# Altium PCB top.PcbDoc
Units mm, origin at the board's own origin, x right, y up, seen from the top; angles counter-clockwise.
Board outline 80 x 54 mm, 2 copper layers (Top Layer, Bottom Layer); 80 components, 53 nets, 230 pads, 72 vias.
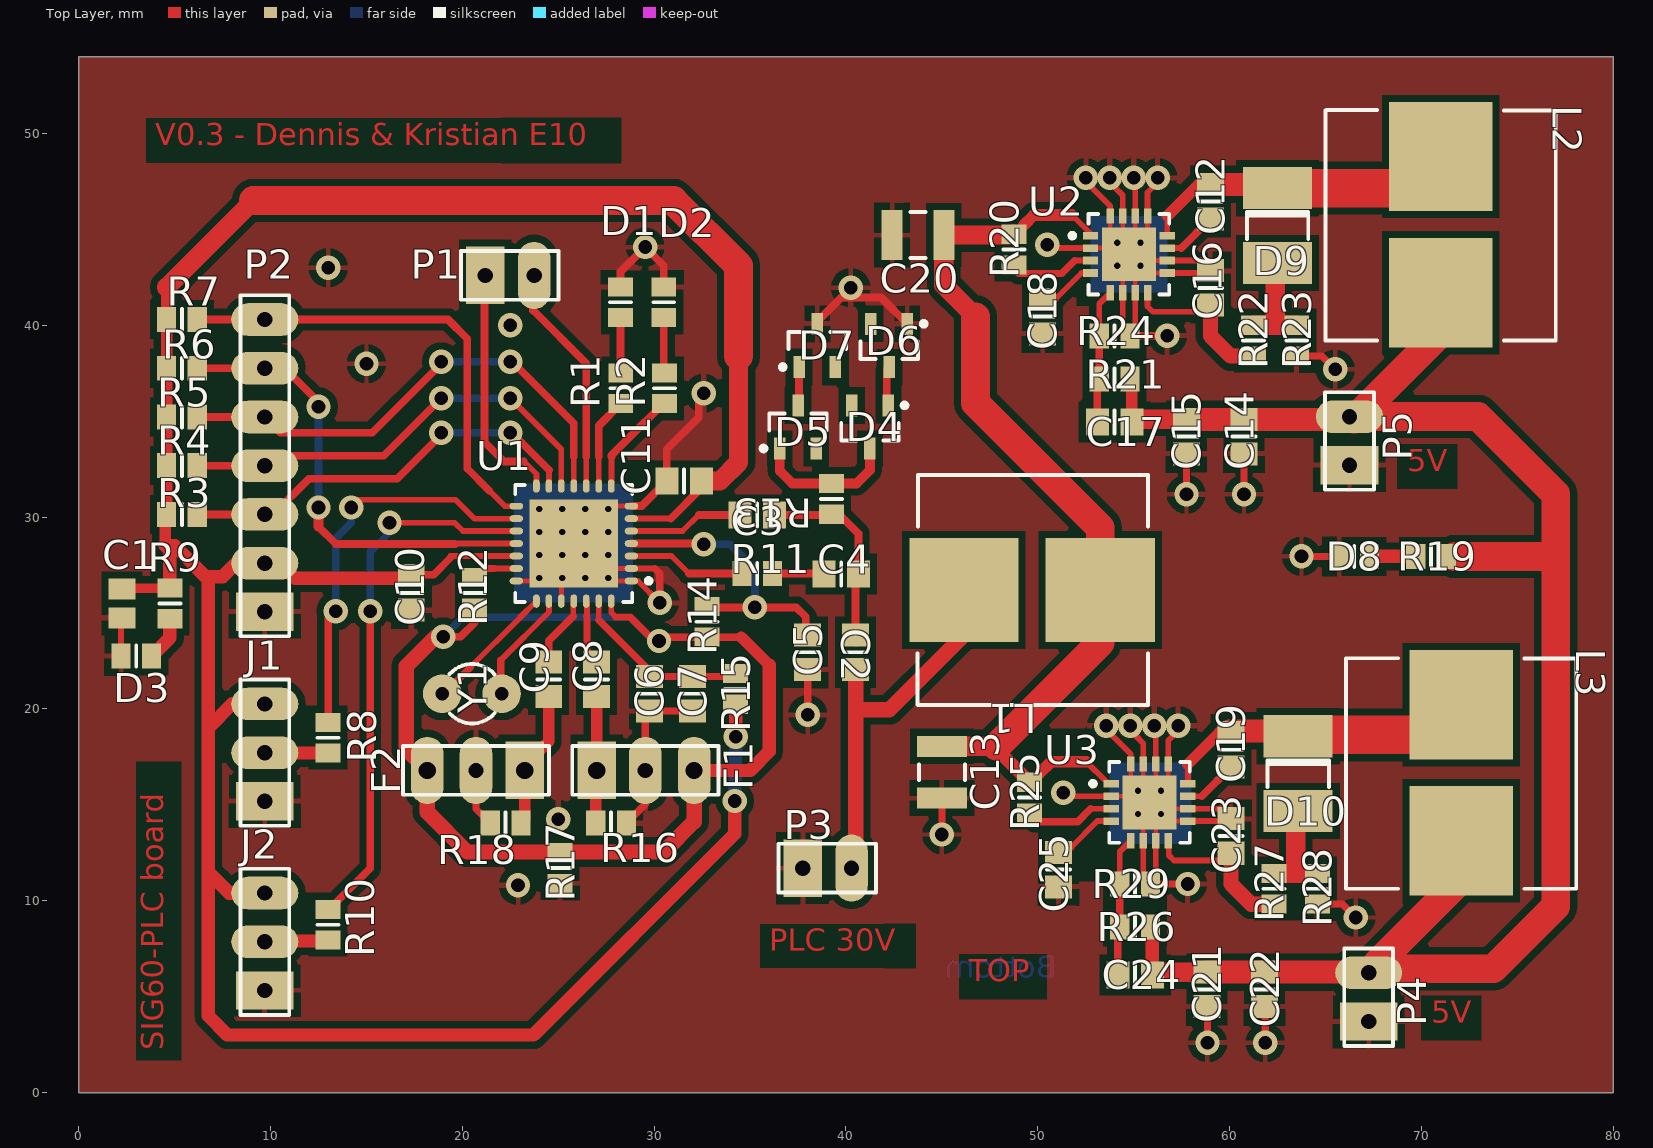
[diagram p0: Top Layer view]
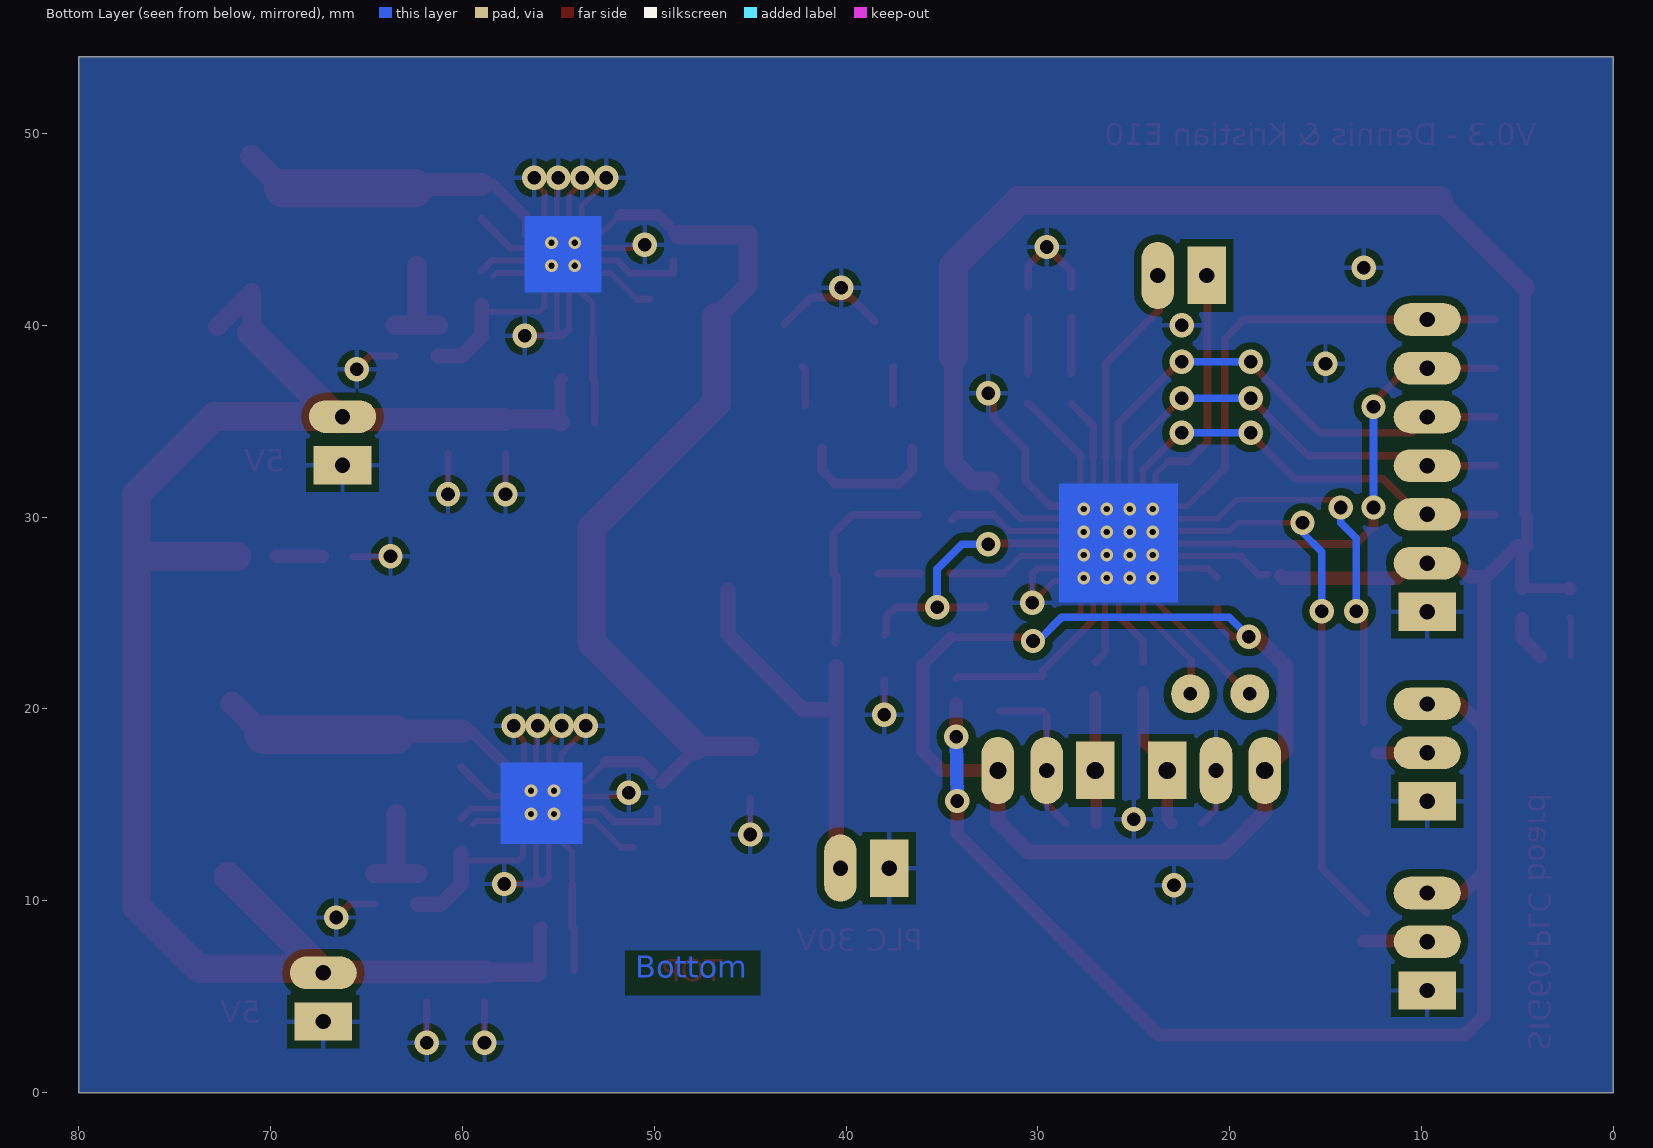
[diagram p1: Bottom Layer view, seen from below]

## Layer stack, top to bottom
Top Layer: signal copper 0.0356
Dielectric: core 0.32, FR-4, Dk 4.8
Bottom Layer: signal copper 0.0356

## Board outline
0,0 80,0 80,54 0,54

## Design rules (kind name [scope] priority, off if disabled: settings)
Clearance Clearance_text [(InNet('GND') AND IsRegion) vs IsText] p1: gap=0
Clearance [All] p2: gap=0.381
PlaneConnect [All] p1: planeconnectstyle=Relief reliefexpansion=0.508 reliefentries=4 reliefconductorwidth=0.2 reliefairgap=0.3
PolygonConnect [All] p1: connectstyle=Relief reliefconductorwidth=0.254 reliefentries=4 polygonreliefangle="90 Angle"
RoutingVias [All] p1: holewidth=0.6 width=1 viastyle="Through Hole" minholewidth=0.711 minwidth=1.27 maxholewidth=0.711 maxwidth=1.27
SilkToSilkClearance [All] p1: silktosilkclearance=0
SilkscreenOverComponentPads [All] p1: minsilkscreentomaskgap=0
SolderMaskExpansion [All] p1: expansion=0.102
Width Width_5V [InNet('+5V')] p1: maxlimit=3 minlimit=0.5 preferedwidth=0.889 bottomlayer_maxwidth=1.524 minimp=50.000000 maximp=50.000000 favimp=50.000000
Width Width_30V [InNet('30VDC_PL')] p2: maxlimit=3 minlimit=0.5 preferedwidth=1.016 bottomlayer_maxwidth=1.524 minimp=50.000000 maximp=50.000000 favimp=50.000000
Width Width_all [All] p3: maxlimit=2 minlimit=0.25 preferedwidth=0.508 bottomlayer_maxwidth=0.762 minimp=50.000000 maximp=50.000000 favimp=50.000000
Width Width_3v3 [InNet('+3V3')] p4: maxlimit=1.524 minlimit=0.3 preferedwidth=0.762 minimp=50.000000 maximp=50.000000 favimp=50.000000
25 further rules are at their usual default settings.

## Classes and differential pairs
component class "Power Supply": C10 C13 C14 C15 C16 C17 C18 C19 C20 C21 C22 C23 C24 C25 D9 D10 L2 L3 R18 R21 R23 R24 R25 R26 R28 U2 U3
component class top: C1 C2 C3 C4 C5 C6 C7 C8 C9 D1 D2 D3 D4 D5 D6 D7 D8 F1 F2 J1 J2 L1 P1 P2 P3 P4 P5 R1 R2 R3 R4 R5 R6 R7 R8 R9 R10 R11 R12 R13 R14 R15 R16 R18 R19 U1 Y1

## Components (designator, comment, footprint, x,y, rotation, side; value= is the part's Value field where it differs from the comment)
C1 "Cap Pol3" C0805 2.25,25.5 r270 top
C2 "Cap Semi" 6-0805_N 40.5,22.95 r270 top
C3 "Cap Semi" 6-0805_N 35.37,30.111 r180 top
C4 "Cap Semi" 6-0805_N 39.75,27.041 r180 top
C5 "Cap Semi" 6-0805_N 38,22.95 r90 top
C6 "Cap Semi" 6-0805_N 29.75,20.791 r90 top
C7 "Cap Semi" 6-0805_N 32,20.791 r90 top
C8 "Cap Semi" 6-0805_N 27,21.541 r90 top
C9 "Cap Semi" 6-0805_N 24.5,21.541 r90 top
C10 "Cap Semi" 6-0805_N 17.336,26.047 r90 top
C11 "Cap Semi" 6-0805_N 31.56,31.889 r0 top
C12 "Cap Semi" 6-0805_N 59,46.45 r270 top
C13 "Cap Semi" C1210 45,16.7 r90 top
C14 "Cap Semi" 6-0805_N 60.75,34.2 r90 top
C15 "Cap Semi" 6-0805_N 57.75,34.2 r90 top
C16 "Cap Semi" 6-0805_N 59,41.95 r270 top
C17 "Cap Semi" 6-0805_N 54,34.95 r0 top
C18 "Cap Semi" 6-0805_N 50.25,40.45 r90 top
C19 "Cap Semi" 6-0805_N 60.075,17.875 r270 top
C20 "Cap Semi" C1210 43.75,44.7 r0 top
C21 "Cap Semi" 6-0805_N 58.825,5.375 r90 top
C22 "Cap Semi" 6-0805_N 61.825,5.375 r90 top
C23 "Cap Semi" 6-0805_N 60.075,13.375 r270 top
C24 "Cap Semi" 6-0805_N 55.075,6.125 r0 top
C25 "Cap Semi" 6-0805_N 51.075,11.625 r90 top
D1 "TX_yellow" 6-0805_L 28.25,41.2 r90 top
D2 "RX_yellow" 6-0805_L 30.5,41.2 r90 top
D3 "PWR_Green" 6-0805_L 3,22.75 r180 top
D4 "BAS70" SOT-23_N 41.25,34.7 r270 top
D5 "BAS70" SOT-23_N 37.5,34.7 r90 top
D6 "BAS70" SOT-23_N 42.25,38.95 r270 top
D7 "BAS70" SOT-23_N 38.5,38.95 r90 top
D8 "PWR_Green" 6-0805_L 66.5,27.95 r180 top
D9 "SR34" CD4532-1812 62.5,45.2 r90 top
D10 "SR34" CD4532-1812 63.575,16.625 r90 top
F1 "5.5MHz" HDR1X3#1 27,16.791 r0 top
F2 "6.5MHz" HDR1X3#1 23.25,16.791 r180 top
J1 "Header 3" HDR1X3#2 9.7,15.18 r90 top
J2 "Header 3" HDR1X3#2 9.7,5.32 r90 top
L1 "100uH" WE_74477006 44.75,26.2 r0 top
L2 "6.3uH" WE_74477006 71,50.2 r270 top
L3 "6.3uH" WE_74477006 72.075,21.625 r270 top
P1 "Header 2" HDR1X2 21.2,42.6 r0 top
P2 "Header 7" HDR1X7 9.7,25.06 r90 top
P3 "Header 2" HDR1X2 37.75,11.7 r0 top
P4 "Header 2" HDR1X2 67.25,3.7 r90 top
P5 "Header 2" HDR1X2 66.25,32.7 r90 top
R1 "Res3" 6-0805_L 28.258,36.715 r270 top
R2 "Res3" 6-0805_L 30.544,36.715 r270 top
R3 "Res3" 6-0805_L 5.382,30.14 r0 top
R4 "Res3" 6-0805_L 5.382,32.68 r0 top
R5 "Res3" 6-0805_L 5.382,35.22 r0 top
R6 "Res3" 6-0805_L 5.382,37.76 r0 top
R7 "Res3" 6-0805_L 5.382,40.3 r0 top
R8 "Res3" 6-0805_L 13,18.5 r90 top
R9 "Res3" 6-0805_L 4.75,25.5 r90 top
R10 "Res3" 6-0805_L 13,8.75 r90 top
R11 "Res3" 6-0805_L 35.37,27.063 r0 top
R12 "Res3" 6-0805_L 20.638,26.047 r270 top
R13 "Res3" 6-0805_L 39.25,30.95 r90 top
R14 "Res3" 6-0805_L 32.75,24.541 r90 top
R15 "Res3" 6-0805_L 34.25,21.041 r90 top
R16 "Res3" 6-0805_L 27.75,14.041 r180 top
R17 "Res3" 6-0805_L 25.1,11.7 r270 top
R18 "Res3" 6-0805_L 22.25,14.041 r0 top
R19 "Res3" 6-0805_L 70.5,27.95 r0 top
R20 "Res3" 6-0805_L 48.75,43.95 r90 top
R21 "Res3" 6-0805_L 54,37.2 r0 top
R22 "Res3" 6-0805_L 61.25,39.2 r90 top
R23 "Res3" 6-0805_L 63.5,39.2 r90 top
R24 "Res3" 6-0805_L 54,39.45 r180 top
R25 "Res3" 6-0805_L 49.575,15.375 r90 top
R26 "Res3" 6-0805_L 55.075,8.625 r0 top
R27 "Res3" 6-0805_L 62.325,10.625 r90 top
R28 "Res3" 6-0805_L 64.575,10.625 r90 top
R29 "Res3" 6-0805_L 55.075,10.875 r180 top
U1 "SIG60" QFN65P600X600X90-28N 25.81,28.622 r180 top
U2 "Buck Converter" QFN65P400X400X80-16N 54.75,43.7 r0 top
U3 "Buck Converter" QFN65P400X400X80-16N 55.825,15.125 r0 top
Y1 "4MHz" R38 20.5,20.791 r90 top

## Footprints (in the part's own frame and the unit in brackets; to place one, negate y for a bottom-side part, rotate by r counter-clockwise, add the part's x,y. Pads: shape width x height; smd on the part's side, far side on the other; paste and mask are expansions set on the pad)
6-0805_L [mm] "Chip Resistor, Body 2.0x1.2mm, IPC High Density"
  rect 1x1.3 smd: 1(-0.8,0) 2(0.8,0)
  silkscreen extent 0,-0.55 0,0.55, body extent -1.07,-0.7 1.07,0.7, height 0.7
6-0805_N [mm] "Chip Resistor, Body 2.0x1.2mm, IPC Medium Density"
  rect 1.2x1.4 smd: 1(-0.9,0) 2(0.9,0)
  silkscreen extent 0,-0.6 0,0.6, body extent -1.07,-0.7 1.07,0.7, height 0.7
C0805 [mm] "Chip Capacitor, Body 2.0x1.3mm, IPC High Density"
  rect 1.1x1.4 smd: 1(-0.75,0) 2(0.75,0)
  body extent -1.1,-0.72 1.1,0.72, height 1.4
C1210 [mm] "Chip Capacitor, Body 3.2x2.5mm, IPC High Density"
  rect 1.1x2.6 smd: 1(-1.35,0) 2(1.35,0)
  silkscreen extent -0.4,-1.2 0.4,1.2, body extent -1.7,-1.35 1.7,1.35, height 1.3
CD4532-1812 [mm] "Chip Diode; Body 4.5 x 3.2 mm (LxW typ)"
  rect 2.2x3.6 smd: 1(-1.95,0) 2(1.95,0)
  silkscreen extent -0.7,-1.6 0.7,1.6
HDR1X2 [mm] "Connector; Header; 2 Position"
  rect 2x3 hole 0.8: 1(0,0)
  oval 1.7x3.5 hole 0.8: 2(2.54,0)
  silkscreen extent -1.27,-1.27 3.81,1.27
HDR1X3#1 [mm]
  rect 2x3 hole 0.9: 1(0,0)
  oval 1.7x3.5 hole 0.8: 2(2.54,0)
  oval 1.7x3.5 hole 0.9: 3(5.08,0)
  silkscreen extent -1.27,-1.27 6.35,1.27
HDR1X3#2 [mm] "Connector; Header; 3 Position"
  rect 2x3 hole 0.8: 1(0,0)
  oval 1.7x3.5 hole 0.8: 2(2.54,0) 3(5.08,0)
  silkscreen extent -1.27,-1.27 6.35,1.27
HDR1X7 [mm] "Connector; Header; 7 Position"
  rect 2x3 hole 0.8: 1(0,0)
  oval 1.7x3.5 hole 0.8: 2(2.54,0) 3(5.08,0) 4(7.62,0) 5(10.16,0) 6(12.7,0) 7(15.24,0)
  silkscreen extent -1.27,-1.27 16.51,1.27
QFN65P400X400X80-16N [mm] "QFN, 16-Leads, Body 4,2x4,2mm (max), Pitch 0,65mm, IPC Medium Density"
  rect 0.8x0.4 smd: 1(-2,0.975) 2(-2,0.325) 3(-2,-0.325) 4(-2,-0.975) 9(2,-0.975) 10(2,-0.325) 11(2,0.325) 12(2,0.975)
  rect 0.4x0.8 smd: 5(-0.975,-2) 6(-0.325,-2) 7(0.325,-2) 8(0.975,-2) 13(0.975,2) 14(0.325,2) 15(-0.325,2) 16(-0.975,2)
  rect 2.8x2.8 smd: 17(0,0)
  silkscreen extent -3.07,-2.1 2.1,2.1, body extent -2.08,-2.07 2.07,2.08, height 0.8
QFN65P600X600X90-28N [mm] "QFN, 28-Leads, Body 6,1x6,1mm (max), Pitch 0,65mm, IPC Medium Density"
  oval 0.7x0.35 smd: 1(-3,1.95) 2(-3,1.3) 3(-3,0.65) 4(-3,0) 5(-3,-0.65) 6(-3,-1.3) 7(-3,-1.95) 15(3,-1.95) 16(3,-1.3) 17(3,-0.65) 18(3,0) 19(3,0.65) 20(3,1.3) 21(3,1.95)
  oval 0.35x0.7 smd: 8(-1.95,-3) 9(-1.3,-3) 10(-0.65,-3) 11(0,-3) 12(0.65,-3) 13(1.3,-3) 14(1.95,-3) 22(1.95,3) 23(1.3,3) 24(0.65,3) 25(0,3) 26(-0.65,3) 27(-1.3,3) 28(-1.95,3)
  rect 4.6x4.6 smd: 29(0,0)
  silkscreen extent -4.03,-3.05 3.05,3.05, body extent -3.05,-3.05 3.05,3.05, height 0.9
R38 [mm] "Crystal, Thru-Hole; 2 Leads; Body 3.1 x 8.2 mm (Dia.xH)"
  round 2 hole 0.7: 1(0,1.55) 2(0,-1.55)
  silkscreen extent -1.55,-1.19 1.55,1.17
SOT-23_N [mm] "SOT23, 3-Leads, Body 2.9x1.3mm, Pitch 0.95mm, Lead Span 2.5mm, IPC Medium Density"
  rect 1.15x0.6 smd: 1(-1.125,0.95) 2(-1.125,-0.95) 3(1.125,0)
  silkscreen extent -1.25,-1.5 0.7,1.93, body extent -0.7,-1.5 0.7,1.5, height 1.1
WE_74477006 [mm]
  rect 5.7x5.4 smd: 1(1.4,0) 2(8.5,0)
  silkscreen extent -1.02,-6 11,6

## Part data
C1: "Polarized Capacitor (Surface Mount)"
C2 C3 C4 C5 C6 C7 C8 C9 C10 C11 C12 C13 C14 C15 C16 C17 C18 C19 C20 C21 C22 C23 C24 C25: "Capacitor (Semiconductor SIM Model)"
D1 D2 D3 D8: library part LED2, "Typical RED, GREEN, YELLOW, AMBER GaAs LED"
D4 D5 D6 D7: library part "Diode BAS70", "Silicon AF Schottky Diode for High-Speed Switching"
D9 D10: library part "D Schottky", "Schottky Diode"
F1 F2: library part "Ceramic Filters", "Header, 3-Pin"
J1 J2: "Header, 3-Pin"
L1 L2 L3: library part Inductor, "Header, 3-Pin"
P1 P3 P4 P5: "Header, 2-Pin"
P2: "Header, 7-Pin"
R1 R2 R3 R4 R5 R6 R7 R8 R9 R10 R11 R12 R13 R14 R15 R16 R17 R18 R19 R20 R21 R22 R23 R24 R25 R26 R27 R28 R29: "Resistor"
U1: "SIG60 device. UART to PLC device."
U2 U3: library part "A4403 Buck Converter", "Header, 3-Pin"
Y1: library part XTAL, "Crystal Oscillator"

## Via types
v1: diameter 1.27, hole 0.711, Top Layer to Bottom Layer, 48 vias
v2: diameter 0.66, hole 0.33, Top Layer to Bottom Layer, tented top, 24 vias

## Nets (pads, with @x,y where several pads share a name; then routed paths per layer and width w, separated by ;. In a path a pad name is that pad's centre, name@x,y a point inside that pad or via, vN(x,y) a via of type N, cw(c..) or ccw(c..) an arc to the next point about the centre after c; other vN are vias at no path point)
30VDC_PL: C2.2 L1.1 P3.2 | length 20.1
  Top Layer w0.8: P3.2@40.5,11.7 40.5,19.95 ; C2.2@40.5,22.2 C2.2 40.5,19.95 ; L1.1 46.15,23.85 42.25,19.95 40.5,19.95
+3V3: C1.1 C10.2 C11.2 J1.3 J2.3 P2.2 R3.1 R4.1 R5.1 R6.1 R7.1 R9.2 R15.1 U1.6 U1.19 | length 156.8
  Top Layer w0.3: 19.368,27.972 U1.19 ; U1.6 30.863,29.922
  Top Layer w0.381: C10.2@18,27 18.5,27 19.42,27.92
  Top Layer w0.4: 30.863,29.922 32.46,31.519 C11.2
  Top Layer w0.406: R3.1@4.5,30.058 R3.1
  Top Layer w0.5: C1.1@2.3,26.3 R9.2 ; C10.2 C10.2@17.389,27
  Top Layer w0.6: 4.5,28.5 R3.1@4.5,30.058 ; R3.1 R4.1 R5.1 R6.1 R7.1 4.582,41.982
  Top Layer w0.7: C1.1 C1.1@2.3,26.3 ; R9.2 4.75,28.25 4.5,28.5 5,28.5 6.75,26.75 ; 6.825,19.075 8.01,20.26 J1.3 ; 7.5,26.9 6.75,26.9 6.75,11.5 ; 7.6,27 8.2,27.6 P2.2 10.5,27.6 11.291,26.809 17.198,26.809 C10.2 ; J2.3 7.85,10.4 6.75,11.5 ; v1(34.2,15.2) 34.2,13.491 23.709,3 7.75,3 6.75,4 6.75,11.5 ; v1(34.25,18.541) R15.1
  Top Layer w1: 4.582,41.982 9.1,46.5 ; C11.2 33.439,31.889 34.4,32.85 34.4,38.4
  Top Layer w1.5: 9.1,46.5 31,46.5 34.4,43.1 34.4,38.4
  Bottom Layer w0.7: v1(34.2,15.2) v1(34.25,18.541)
+5V: C14.2 C15.2 C17.2 C21.2 C22.2 C24.2 L2.2 L3.2 P4.2 P5.2 R19.2 R21.2 R26.2 | length 94.7
  Top Layer w0.6: R21.2 54.9,37.1 C17.2 ; R26.2 R26.2@55.975,8.525
  Top Layer w0.7: C24.2@55.975,6.375 R26.2@55.975,8.525
  Top Layer w1: C17.2 55.05,35.1 C15.2 ; C24.2@56.125,6.275 C21.2 ; L2.2@71,39.6 L2.2 L2.2@72.75,39.95
  Top Layer w1.2: C15.2 C14.2 P5.2@66.5,35.1 ; C21.2 C22.2 P4.2@67.575,6.275
  Top Layer w1.5: P5.2 P5.2@66.64,35.24 ; P5.2@66.5,35.1 P5.2@66.64,35.24 ; P4.2@67.575,6.275 67.75,6.45 73.75,6.45 77,9.7 77,31.2 72.96,35.24 P5.2@66.64,35.24 ; P4.2@67.725,6.775 L3.2@72.225,11.275 ; L2.2@71,39.6 P5.2@66.64,35.24 ; R19.2@71.75,27.95 76.7,27.95
GND: C1.2 C5.1 C6.1 C7.1 C10.1 C11.1 C13.1 C14.1 C15.1 C16.1 C18.1 C20.1 C21.1 C22.1 C23.1 C25.1 D1.2 D2.2 D3.2 D6.1 D7.3 D8.2 F1.2 F2.2 J1.1 J2.1 P2.1 P3.1 P4.1 P5.1 R16.1 R17.2 R18.1 R23.1 R24.1 R28.1 R29.1 U1.1 U1.2 U1.7 U1.21 U1.24 U1.29 U2.2 U2.6 U2.7 U2.9 U2.10 U2.13 U2.14 U2.15 U2.16 U2.17 U3.2 U3.6 U3.7 U3.9 U3.10 U3.13 U3.14 U3.15 U3.16 U3.17 | length 145.6
  Top Layer w0.25: U1.21 U1.29@23.86,26.672 ; U1.24 U1.29@25.16,27.972 ; U1.29@27.11,27.322 U1.2 ; U1.29@27.76,26.672 U1.1 ; U1.29@27.76,30.572 U1.7 ; U2.2 54.425,44.025 U2.15 ; U2.17@53.775,44.675 U2.16 ; U3.2 55.5,15.45 U3.15 ; U2.6 U2.17@54.425,43.375 ; U3.17@54.85,16.1 U3.16 ; U2.7 55.075,43.375 U2.10 ; U2.17@55.075,44.025 U2.14 ; U3.6 U3.17@55.5,14.8 ; U2.17@55.725,42.725 U2.9 ; U2.17@55.725,44.675 U2.13 ; U3.7 56.15,14.8 U3.10 ; U3.17@56.15,15.45 U3.14 ; U3.17@56.8,14.15 U3.9 ; U3.17@56.8,16.1 U3.13
  Top Layer w0.3: D3.2 2.2,24.7 C1.2 ; U1.1 29.157,26.672 v1(30.29,25.539) ; U1.2 30.031,27.322 ; v1@50.825,44.025 U2.2 ; v1@51.65,15.45 U3.2@53.575,15.45 ; v1@52.5,47.45 52.55,47.45 53.775,46.225 U2.16 ; v1@53.575,18.875 53.625,18.875 54.85,17.65 U3.16 ; v1@54,47.45 54,47.2 54.425,46.775 U2.15 ; R24.1@54.425,39.825 U2.6 ; v1@55.075,18.875 55.075,18.625 55.5,18.2 U3.15 ; R24.1@55.075,39.725 U2.7 ; U2.14 v1@55.075,47.45 ; R29.1@55.5,11.25 U3.6 ; U2.13 55.725,46.925 v1@56.25,47.45 ; R29.1@56.15,11.15 U3.7 ; U3.14 v1@56.15,18.875 ; U2.9 58.225,42.725 C16.1@58.375,42.575 ; U2.10 C16.1@58.475,43.375 ; U3.13 56.8,18.35 v1@57.325,18.875 ; U3.9 59.3,14.15 C23.1@59.45,14 ; U3.10 C23.1@59.55,14.8
  Top Layer w0.381: F2.2 20.71,14.781 R18.1 ; R16.1 29.54,15.031 F1.2 29.54,19.681 C6.1 C7.1 ; 30.031,27.322 30.29,27.063 v1(30.29,25.539) ; v1(38,19.7) C5.1@38,21.541 ; v1(45,13.45) C13.1 ; U2.17@53.775,44.675 v2(54.15,44.3) 54.425,44.025 U2.17 ; R24.1@54.425,39.825 R24.1 ; U2.17@54.425,43.375 U2.17 ; U3.17@54.85,16.1 v2(55.225,15.725) 55.5,15.45 U3.17 ; R24.1@55.075,39.725 R24.1 ; R29.1@55.5,11.25 R29.1 ; U3.17@55.5,14.8 U3.17 ; U2.17@55.725,42.725 v2(55.35,43.1) 55.075,43.375 U2.17 ; U2.17@55.725,44.675 55.075,44.025 U2.17 ; R29.1@56.15,11.15 R29.1 ; v1@56.5,39.45 R24.1 ; U3.17@56.8,14.15 v2(56.425,14.525) 56.15,14.8 U3.17 ; U3.17@56.8,16.1 56.15,15.45 U3.17 ; v1@57.575,10.875 R29.1 ; v1(57.75,31.2) C15.1 ; C16.1@58.475,43.375 C16.1 ; v1(58.85,2.6) C21.1@58.85,4.7 ; C23.1@59.55,14.8 C23.1 ; v1(60.75,31.2) C14.1 ; v1(61.85,2.6) C22.1@61.85,4.7 ; R23.1 64.8,38.4 v1(65.5,37.7) ; v1@64,27.95 D8.2 ; R28.1 65.875,9.825 v1(66.575,9.125)
  Top Layer w0.406: U1.29@25.16,27.972 U1.29 ; v2(27.61,26.822) 27.11,27.322 v2(26.41,28.022) U1.29 ; U1.29@27.76,30.572 U1.29 ; D1.2 28.25,42.803 v1(29.528,44.081) 30.5,43.109 D2.2 ; U1.7@28.81,30.582 29.353,30.582 C11.1 30.66,33.529 32.322,35.191 v1@32.322,36.461 ; D7.3@38.5,40.2 39.75,41.45 41.825,41.45 D6.1
  other v1: 22.9,10.8 57.825,10.875 25,14.25 51.325,15.625 53.575,19.125 54.825,19.125 56.075,19.125 57.325,19.125 63.75,27.95 32.576,36.461 15,38 56.75,39.45 22.5,40 40.25,41.95 13,43 50.5,44.2 52.5,47.7 53.75,47.7 55,47.7 56.25,47.7
  other v2: 55.225,14.525 56.425,15.725 24.01,26.822 25.21,26.822 26.41,26.822 24.01,28.022 25.21,28.022 27.61,28.022 24.01,29.222 25.21,29.222 26.41,29.222 27.61,29.222 24.01,30.422 25.21,30.422 26.41,30.422 27.61,30.422 54.15,43.1 55.35,44.3
NetC2_1: C2.1 C3.1 C4.1 R13.1 | length 10.6
  Top Layer w0.406: C3.1 39.68,30.111 40.65,29.141 C4.1 40.5,26.891 40.5,23.895 40.546,23.85 C2.1@40.546,23.45
NetC3_2: C3.2 U1.5 | length 6.1
  Top Layer w0.3: U1.5 31.483,29.272 32.322,30.111
  Top Layer w0.406: 32.322,30.111 34.216,30.111 C3.2@34.47,29.857
NetC4_2: C4.2 R11.2 | length 2.1
  Top Layer w0.406: R11.2 C4.2@38.302,27.063
NetC5_2: C5.2 R14.2 U1.4 | length 14.8
  Top Layer w0.406: U1.4 v1@32.033,28.622 ; R14.2 32.8,25.291 v1(35.25,25.291) 37.409,25.291 37.9,24.8 37.9,23.95 C5.2
  Bottom Layer w0.406: v1(32.576,28.587) 33.954,28.587 35.25,27.291 v1(35.25,25.291)
NetC6_2: C6.2 C7.2 R15.2 U1.27 | length 9.6
  Top Layer w0.3: 27.11,24.64 U1.27
  Top Layer w0.381: 27.11,24.64 29.75,22 C6.2 C7.2 34.15,21.691 R15.2@34.25,21.591
NetC8_1: C8.1 F1.1 R16.2 | length 6.6
  Top Layer w0.6: R16.2 26.95,16.741 F1.1 C8.1
NetC8_2: C8.2 U1.26 | length 3.4
  Top Layer w0.3: 26.491,24.827 U1.26@26.491,25.591
  Top Layer w0.381: 26.491,24.827 26.5,24.818 26.5,22.941 C8.2
NetC9_1: C9.1 F2.1 R18.2 | length 6.3
  Top Layer w0.606: R18.2 23.25,14.241 F2.1 ; F2.1@23.902,17.703 24.5,18.301 C9.1@24.5,20.881
NetC9_2: C9.2 U1.25 | length 3.7
  Top Layer w0.3: 25.779,24.827 U1.25@25.779,25.591
  Top Layer w0.381: C9.2 24.5,23.548 25.779,24.827
NetC12_1: C12.1 D9.2 L2.1 U2.12 | length 16.7
  Top Layer w0.3: U2.12@56.75,44.679 56.75,45.7
  Top Layer w0.4: C12.1@58.4,47.35 C12.1 ; D9.2@62.3,47.35 D9.2
  Top Layer w0.6: 56.75,45.7 C12.1@58.4,47.35
  Top Layer w1.2: C12.1 D9.2@62.3,47.35 ; L2.1@69.35,47.15 L2.1
  Top Layer w2: D9.2 L2.1@69.35,47.15
NetC12_2: C12.2 U2.11 | length 2.9
  Top Layer w0.3: U2.11 57.475,44.025
  Top Layer w0.406: 57.475,44.025 C12.2
NetC13_2: C13.2 C20.2 L1.2 R20.2 R25.2 U2.1 U3.1 | length 49.7
  Top Layer w0.3: 51.779,45.75 U2.1@52.75,44.779 ; 52.529,17.25 U3.1@53.575,16.204
  Top Layer w0.6: R20.2@49.264,45.214 49.8,45.75 51.779,45.75 ; R25.2@50.089,16.639 50.7,17.25 52.529,17.25
  Top Layer w0.7: 47.85,17.9 R25.2
  Top Layer w1: C13.2 47.85,18.05 47.85,17.9 ; 46.75,40.45 45.1,42.1 C20.2 48.7,44.7 R20.2
  Top Layer w1.5: 46.75,40.45 46.75,35.95 53.25,29.45 L1.2 53.25,23.45 47.85,18.05
NetC16_2: C16.2 R22.1 U2.8 | length 8.5
  Top Layer w0.3: U2.8 55.725,40.975 56,40.7 58.65,40.7 C16.2
  Top Layer w0.8: C16.2 59,39.45 60.05,38.4 R22.1
NetC17_1: C17.1 R21.1 R24.2 U2.5 | length 7
  Top Layer w0.3: R24.2 53.2,41.125 U2.5
  Top Layer w0.381: C17.1 53.1,37.1 R21.1 R24.2
NetC18_2: C18.2 U2.4 | length 3.1
  Top Layer w0.3: C18.2@50.9,41.35 52.275,42.725 U2.4
  Top Layer w0.381: C18.2 C18.2@50.9,41.35
NetC19_1: C19.1 D10.2 L3.1 U3.12 | length 16.7
  Top Layer w0.3: U3.12@57.825,16.104 57.825,17.125
  Top Layer w0.4: C19.1@59.4,18.85 C19.1@60,18.85 ; D10.2@63.3,18.85 D10.2@63.5,18.65
  Top Layer w0.6: 57.825,17.125 C19.1@59.475,18.775
  Top Layer w1.2: C19.1@60,18.85 D10.2@63.3,18.85 ; L3.1@70.35,18.65 L3.1@72,20.3
  Top Layer w2: D10.2@63.5,18.65 L3.1@70.35,18.65
NetC19_2: C19.2 U3.11 | length 2.9
  Top Layer w0.3: U3.11 58.55,15.45
  Top Layer w0.406: 58.55,15.45 C19.2
NetC23_2: C23.2 R27.1 U3.8 | length 8.5
  Top Layer w0.3: U3.8@56.825,13.1 56.825,12.375 57.1,12.1 C23.2@59.75,12.1 ; C23.2@59.725,12.125 C23.2
  Top Layer w0.8: C23.2 60.075,10.875 61.125,9.825 R27.1
NetC24_1: C24.1 R26.1 R29.2 U3.5 | length 7
  Top Layer w0.3: R29.2 54.275,12.55 U3.5
  Top Layer w0.381: C24.1@54.175,6.375 54.175,8.525 R26.1 R29.2
NetC25_2: C25.2 U3.4 | length 3.1
  Top Layer w0.3: C25.2@51.725,12.775 53.1,14.15 U3.4@53.575,14.15
  Top Layer w0.381: C25.2@51.075,12.775 C25.2@51.725,12.775
NetD1_1: D1.1 R1.1 | length 2.9
  Top Layer w0.406: D1.1 28.25,37.523 R1.1
NetD2_1: D2.1 R2.1 | length 2.9
  Top Layer w0.406: D2.1 30.5,37.559 R2.1
NetD3_1: D3.1 R9.1 | length 2.3
  Top Layer w0.7: D3.1 4.75,23.7 R9.1
NetD4_1: D4.1 D6.3 | length 2
  Top Layer w0.406: D4.1@42.129,35.834 42.129,37.704 D6.3
NetD4_3: D4.3 D5.1 R13.2 | length 7.6
  Top Layer w0.5: D5.1 36.55,32.4 37.2,31.75 R13.2 40.55,31.75 41.25,32.45 D4.3
NetD5_3: D5.3 D7.1 | length 1.9
  Top Layer w0.406: D5.3@37.55,35.885 D7.1
NetD8_1: D8.1 R19.1 | length 2.4
  Top Layer w0.7: D8.1 R19.1
NetD9_1: D9.1 R22.2 R23.2 | length 5.6
  Top Layer w0.406: D9.1@62.375,43.125 D9.1
  Top Layer w1: R22.2 62.375,40 ; D9.1@62.375,43.125 62.375,40 ; R23.2 62.375,40
NetD10_1: D10.1 R27.2 R28.2 | length 5.6
  Top Layer w0.406: D10.1@63.45,14.55 D10.1
  Top Layer w1: R27.2 63.45,11.425 ; D10.1@63.45,14.55 63.45,11.425 ; R28.2 63.45,11.425
NetF1_3: F1.3 F2.3 R12.2 R14.1 R17.1 U1.28 | length 61.9
  Top Layer w0.3: U1.28 27.76,25.031 28,24.791
  Top Layer w0.381: 28,24.791 28.75,24.791 29.78,23.761 30.29,23.761 30.31,23.741 R14.1
  Top Layer w0.4: R14.1 34.55,23.741
  Top Layer w0.406: v1(19,23.761) 19.899,23.761 20.638,24.5 R12.2
  Top Layer w0.6: 34.55,23.741 36,22.291
  Top Layer w0.7: F1.3 35,16.791 36,17.791 36,22.291
  Top Layer w0.806: v1@18.595,23.75 17.082,22.237 17.082,17.879 F2.3 18.17,14.621 20.25,12.541 30.5,12.541 32.08,14.121 F1.3
  Bottom Layer w0.406: v1(19,23.761) 20.016,24.777 28.764,24.777 29.907,23.634 v1@30.163,23.634
  other v1: 30.25,23.541
NetJ1_2: J1.2 R8.1 | length 2.6
  Top Layer w0.381: J1.2 J1.2@9.72,17.7
  Top Layer w0.7: J1.2@9.72,17.7 12.3,17.7
NetJ2_2: J2.2 R10.1 | length 3.3
  Top Layer w0.7: J2.2 9.74,7.9 R10.1@13,7.9
NetP1_1: P1.1 U1.14 | length 12.7
  Top Layer w0.3: 23.195,32.905 23.86,32.24 U1.14
  Top Layer w0.406: P1.1@21.146,42.6 21.146,33.921 22.162,32.905 23.195,32.905
NetP1_2: P1.2 U1.10 | length 11.4
  Top Layer w0.3: U1.10 26.46,33.159
  Top Layer w0.406: P1.2@23.686,41.9 23.686,40.779 26.46,38.005 26.46,33.159
NetP2_6: P2.6 R6.2 U1.18 | length 24.3
  Top Layer w0.3: 19.622,28.622 U1.18
  Top Layer w0.4: 12.5,29.5 13.4,28.6 19.609,28.6 19.622,28.587
  Top Layer w0.406: R6.2 P2.6 10.74,37.76 12.3,36.2 v1@12.3,35.6
  Top Layer w0.5: v1@12.2,30.3 12.5,30 12.5,29.5
  Bottom Layer w0.406: v1@12.2,30.5 v1@12.3,30.6 ; v1@12.5,30.55 v1(12.5,35.75)
  other v1: 12.5,30.5
NetP2_7: P2.7 R7.2 U1.15 | length 24.6
  Top Layer w0.3: 21.4,31.381 22.209,30.572 U1.15
  Top Layer w0.381: 20.25,32.531 21.4,31.381
  Top Layer w0.406: R7.2 P2.7 19.25,40.3 20.25,39.3 20.25,38.452 20.25,32.531
NetR1_2: R1.2 U1.9 | length 4.8
  Top Layer w0.3: U1.9 27.11,33.159
  Top Layer w0.406: 27.11,33.159 27.11,34.767 ; 27.12,34.777 R1.2
NetR2_2: R2.2 U1.8 | length 5.5
  Top Layer w0.3: U1.8@27.77,31.622 27.77,33.141
  Top Layer w0.406: 27.77,33.141 27.77,33.22 28.677,34.127 30.465,35.915 R2.2
NetR8_2: R8.2 U1.16 | length 20.8
  Top Layer w0.3: v1(14.2,30.5) 14.6,30.9 19.647,30.9 20.635,29.912 U1.16@22.71,29.912
  Top Layer w0.381: R8.2 13,24.7 v1(13.4,25.1)
  Bottom Layer w0.381: v1(13.4,25.1) 13.4,28.9 14.2,29.7 v1(14.2,30.5)
NetR10_2: R10.2 U1.17 | length 28.4
  Top Layer w0.3: v1(16.2,29.7) 19.6,29.7 20.028,29.272 U1.17
  Top Layer w0.381: R10.2@12.85,9.35 15.2,11.7 v1(15.2,25.1)
  Bottom Layer w0.381: v1@15.2,25.2 15.2,28.2 16.2,29.2 v1(16.2,29.7)
NetR11_1: R11.1 U1.3 | length 6.1
  Top Layer w0.3: U1.3 30.905,27.972 31.814,27.063
  Top Layer w0.406: 31.814,27.063 R11.1
NetR12_1: R12.1 U1.20 | length 2.4
  Top Layer w0.3: 21.654,27.322 U1.20
  Top Layer w0.381: R12.1 21.113,27.322 21.654,27.322
NetR20_1: R20.1 U2.3 | length 4.7
  Top Layer w0.3: 51.925,43.375 U2.3
  Top Layer w0.381: R20.1@49,43.4 49,42.7 51.25,42.7 51.925,43.375
NetR25_1: R25.1 U3.3 | length 4.7
  Top Layer w0.3: 52.75,14.8 U3.3@53.575,14.8
  Top Layer w0.381: R25.1@49.825,14.825 49.825,14.125 52.075,14.125 52.75,14.8
NetU1_22: U1.22 Y1.1 | length 6.9
  Top Layer w0.3: 20.405,22.155 22.988,24.738 22.988,24.75 U1.22
  Top Layer w0.381: Y1.1 19.041,20.791 20.405,22.155
NetU1_23: U1.23 Y1.2 | length 6.2
  Top Layer w0.3: 22,22.541 24.51,25.051 U1.23
  Top Layer w0.406: 22,22.541 22,20.729 Y1.2@22.188,20.541
NRESET: P2.4 R4.2 U1.12 | length 23.5
  Top Layer w0.3: v1(22.5,36.2) 25.16,33.54 U1.12
  Top Layer w0.381: P2.4 10.22,33.2 15.9,33.2 v1(18.9,36.2)
  Top Layer w0.406: R4.2 P2.4
  Bottom Layer w0.381: v1(18.9,36.2) v1(22.5,36.2)
NSLEEP: P2.3 R3.2 U1.13 | length 21.8
  Top Layer w0.3: U1.13@24.52,31.622 24.52,32.452
  Top Layer w0.406: R3.2 P2.3 ; P2.3@9.7,30.394 P2.3 ; v1(18.9,34.4) 18.9,34.3 16.6,32 12,32 10.14,30.14 P2.3 ; v1@22.67,34.302 24.52,32.452
  Bottom Layer w0.406: v1(18.9,34.4) v1(22.5,34.4)
WAKE: P2.5 R5.2 U1.11 | length 26.5
  Top Layer w0.3: U1.11 25.81,33.159
  Top Layer w0.406: R5.2 P2.5 ; P2.5@9.446,35.474 P2.5 ; v1(18.9,38.1) 18.9,38 15.3,34.4 10.52,34.4 P2.5 ; v1@22.55,38.15 25.81,34.89 25.81,33.159
  Bottom Layer w0.406: v1(18.9,38.1) v1(22.5,38.1)
pads on no net: D4.2 D5.2 D6.2 D7.2
copper on no net: | length 0.3
  Top Layer w0.3: 53.325,18.875 53.575,18.875

## Polygon pours and split planes (outlines as drawn)
GND on Top Layer "GND" (solid, remove dead copper, pour order 38): 52,54 52,0 30,0 30,54
GND on Top Layer "GND" (solid, remove dead copper, pour order 44): 0,22.877 0.123,23 42,23 42,0 0,0
GND on Top Layer "GND" (solid, remove dead copper, pour order 34): 0,54 80,54 80,47 0,47
GND on Top Layer "GND" (solid, remove dead copper, pour order 36): 58,54 58,18 58,0 80,0 80,54
GND on Top Layer "GND" (solid, remove dead copper, pour order 40): 80,40 79,41 31,41 31,19 80,19
GND on Top Layer "GND" (solid, remove dead copper, pour order 42): 0,54 21,54 22,53 22,0 0,0
GND on Top Layer "GND" (solid, remove dead copper, pour order 46): 0,54 0,33 43,33 43,54
GND on Top Layer "GND" (solid, remove dead copper, pour order 48): 80,11 45,11 45,0 80,0
GND on Bottom Layer "GND" (solid, remove dead copper, pour order 50): 0,54 80,54 80,0 0,0

## Other copper
Top Layer:
  text "V0.3 - Dennis & Kristian E10" at 4,49 h2
  text "5V" at 69.25,32 h2
  text "PLC 30V" at 36,7 h2
  text "TOP" at 46.4,5.4 h2
  text "5V" at 70.5,3.25 h2
  text "SIG60-PLC board" at 4.8,2.2 h2 r90
Bottom Layer:
  rectangle net GND: 52.75,41.7 56.75,45.7
  rectangle net GND: 53.75,12.95 58,17.2
  rectangle net GND: 22.7,25.541 28.9,31.741
  text "Bottom" at 51,5.6 h2